# EAGLE board laser_sync (EAGLE 5.09)
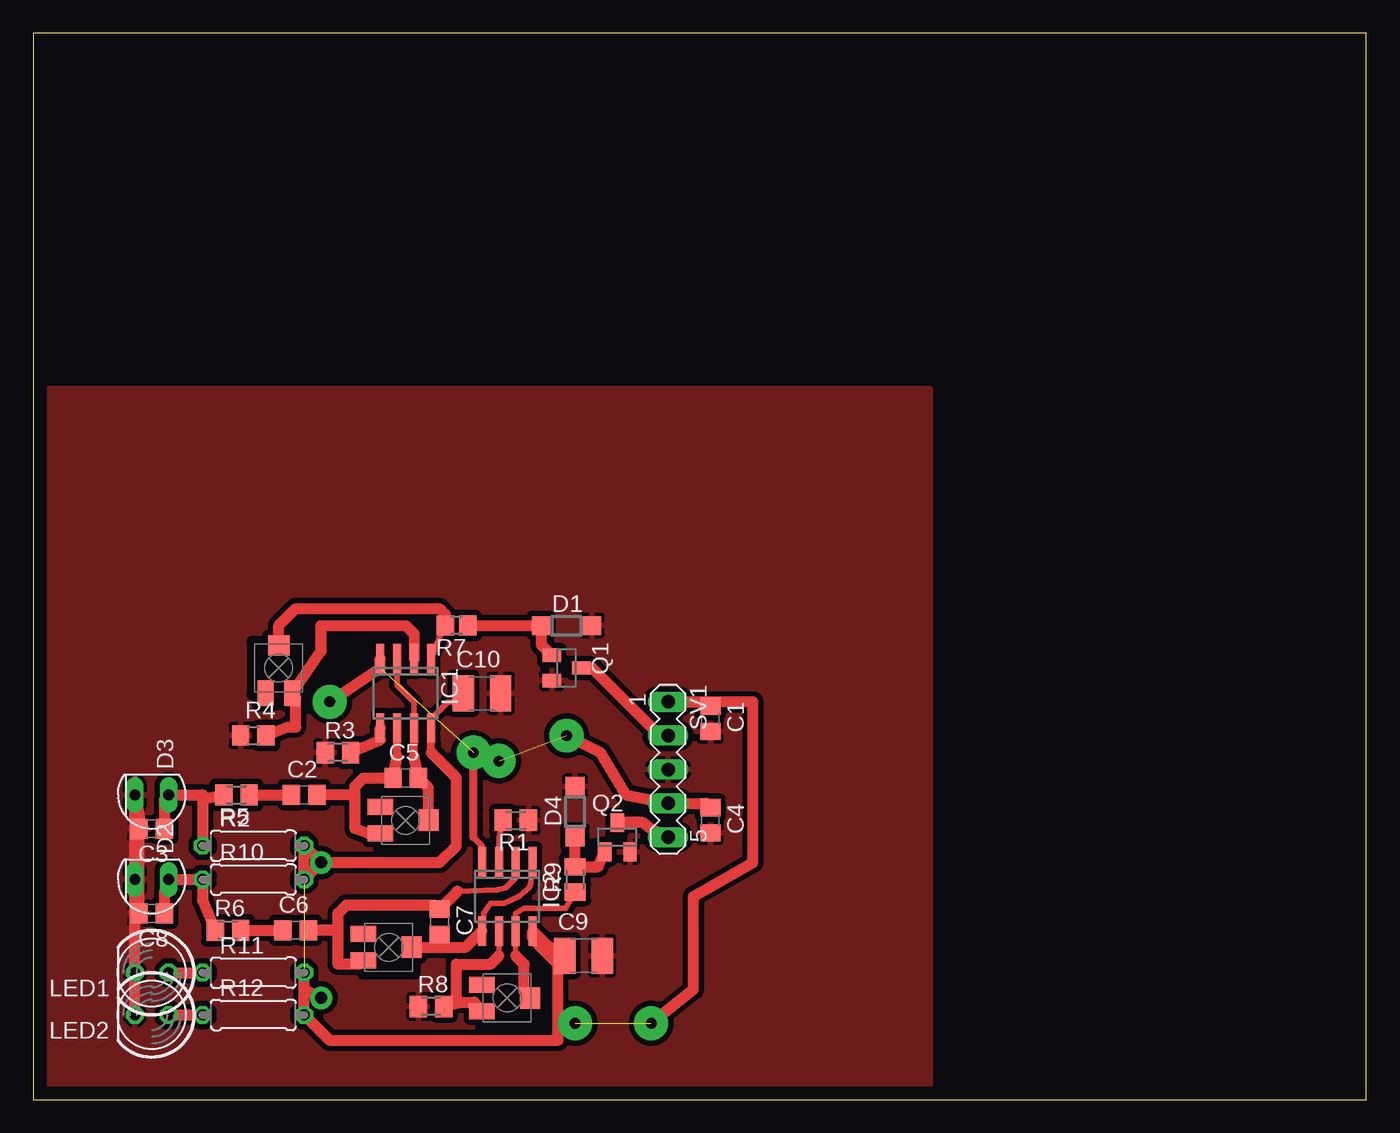
[diagram p0: board, top side]

Size 100 x 80 mm. Coordinates in mm from the lower left corner, seen from the top.
Outline: 0,0 100,0 100,80 0,80 0,0
Copper layers (1*16): Top 0.035mm / dielectric 1.5mm / Bottom 0.035mm
Design rules "default": minimum track width 10mil, minimum drill 24mil, track to track 8mil, track to pad 8mil, pad to pad 8mil, via to via 8mil, smd to smd 8mil, copper to edge 40mil, drill to drill 8mil, minimum pad ring 10mil, minimum via ring 8mil, stop-mask expansion 4mil, vias tented up to drill 0mil, thermal gap 10mil

## Footprints (pad centres in the part's own frame; a part is rotated, then mirrored left to right if it is on the bottom)
C0805 = smd 1.3 x 1.5: 1 -0.95,0; 2 0.95,0
C1210 = smd 1.6 x 2.7: 1 -1.4,0; 2 1.4,0
SOD123 = smd 1.4 x 1.4: A 1.9,0; C -1.9,0
SFH206 = drill 0.813 long: A 0,-1.27; K 0,1.27
SO08 = smd 0.6 x 2.2: 1 -1.905,-2.6; 2 -0.635,-2.6; 3 0.635,-2.6; 4 1.905,-2.6; 5 1.905,2.6; 6 0.635,2.6; 7 -0.635,2.6; 8 -1.905,2.6
LED5MM = drill 0.813 octagon: A -1.27,0; K 1.27,0
SOT23 = smd 1 x 1.4: 1 -0.95,-1.1; 2 0.95,-1.1; 3 0,1.1
M0805 = smd 1.3 x 1.6: 1 -0.95,0; 2 0.95,0
0207/7 = drill 0.813 octagon: 1 -3.81,0; 2 3.81,0
R0805 = smd 1.3 x 1.5: 1 -0.95,0; 2 0.95,0
R0805' = smd 1.3 x 1.5: 1 -0.85,0; 2 0.85,0
MA05-1 = drill 1.016 long: 1 -5.08,0; 2 -2.54,0; 3 0,0; 4 2.54,0; 5 5.08,0
TRIMMER_SMD = smd 1.2 x 1.9: A 1,-1.9; E -1,-1.9 | smd 1.6 x 1.5: S 0,1.7

## Placement (x,y rotation side)
C1  100n  [C0805]  50.8,28.57 270 top
C2  100n  [C0805]  20.32,22.86 0 top
C3  50n  [C0805]  8.89,20.32 180 top
C4  100n  [C0805]  50.8,20.95 270 top
C5  100n  [C0805]  27.94,24.13 0 top
C6  100n  [C0805]  19.68,12.7 0 top
C7  100n  [C0805]  30.48,13.34 270 top
C8  50n  [C0805]  8.89,13.97 180 top
C9  [C1210]  41.27,10.79 0 top
C10  [C1210]  33.66,30.48 0 top
D1  [SOD123]  40.01,35.56 0 top
D2  SFH206  [SFH206]  8.89,16.51 90 top
D3  SFH206  [SFH206]  8.89,22.86 90 top
D4  [SOD123]  40.64,21.59 90 top
IC1  TL072D  [SO08]  27.94,30.48 180 top
IC2  TL072D  [SO08]  35.56,15.24 180 top
LED1  [LED5MM]  8.89,9.53 180 top
LED2  [LED5MM]  8.89,6.35 180 top
Q1  BSS123  [SOT23]  40.01,32.38 270 top
Q2  BSS123  [SOT23]  43.81,19.68 0 top
R1  100  [M0805]  36.2,20.95 180 top
R2  200  [0207/7]  16.51,19.05 0 top
R3  100  [M0805]  22.86,26.04 0 top
R4  1k  [R0805]  16.51,27.3 0 top
R5  100  [M0805]  15.24,22.86 180 top
R6  100  [M0805]  14.61,12.7 0 top
R7  100  [R0805']  31.75,35.56 180 top
R8  1k  [M0805]  29.84,6.99 0 top
R9  100  [M0805]  40.64,16.51 90 top
R10  200  [0207/7]  16.51,16.51 0 top
R11  330  [0207/7]  16.51,9.53 0 top
R12  330  [0207/7]  16.51,6.35 0 top
SV1  [MA05-1]  47.62,24.77 270 top
TRIMM1  100K  [TRIMMER_SMD]  18.41,32.38 0 top
TRIMM2  100K  [TRIMMER_SMD]  27.94,20.95 270 top
U$1  TRIMMER  [TRIMMER_SMD]  35.56,7.62 270 top
U$2  TRIMMER  [TRIMMER_SMD]  26.67,11.43 270 top

## Library data of the parts
C1-C10 R2 R4 = rcl
D1 D4 = diode
D2 D3 = opto-trans-siemens
IC1 IC2 = linear
LED1 LED2 = led
Q1 Q2 = transistor-small-signal
R1 R3 R5-R12 = resistor
SV1 = con-lstb
TRIMM1 TRIMM2 U$1 U$2 = siro

## Nets
GND: C1.2 C3.2 C4.2 C8.2 C9.2 C10.2 D1.A D2.K D3.K D4.A LED1.K LED2.K Q1.2 Q2.2 R1.1 R3.1 R4.1 R8.1 SV1.3
N$1: IC1.2 R4.2 TRIMM1.A
N$2: C3.1 D3.A R2.1 R5.2
N$3: D1.C Q1.1 R7.1
N$4: IC1.1 R7.2 TRIMM1.S
N$5: C2.2 C5.1 IC1.6 TRIMM2.A
N$6: C7.2 IC2.1 IC2.5 U$2.S
N$7: IC1.5 R3.2
N$8: C8.1 D2.A R6.1 R10.1
N$9: IC2.6 R8.2 U$1.A
N$10: Q2.3 SV1.5
N$11: C2.1 R5.1
N$12: C6.1 R6.2
N$13: C6.2 C7.1 IC2.2 U$2.A
N$14: IC2.3 R1.2
N$15: C5.2 IC1.3 IC1.7 TRIMM2.S
N$16: C1.1 C9.1 C10.1 IC1.8 IC2.8 R2.2 R10.2 R11.2 R12.2 SV1.1
N$17: IC2.7 R9.1 U$1.S
N$18: D4.C Q2.1 R9.2
N$24: LED2.A R12.1
N$25: Q1.3 SV1.2
N$26: LED1.A R11.1
V-: C4.1 IC1.4 IC2.4 SV1.4

## Tracks (layer width: path | path; a pad name or v marks a point on that pad's centre or on a via)
GND
  Top 0.813: LED2.K LED1.K 7.62,17.46 C8.2 7.94,20 D2.K D3.K | D3.K 7.62,23.81 C3.2 7.94,21.27 D3.K
  pour Top (isolate 0.406): 0,53.34 0,0 67.31,0 67.31,53.34
N$1
  Top 0.813: R4.2 19.05,27.94 19.68,27.94 19.68,30.12 TRIMM1.A 21.59,33.66 21.59,35.56 27.94,35.56 28.57,34.92 IC1.2
N$2
  Top 0.813: C3.1 9.84,22.54 D3.A 12.7,22.86 12.7,22.55 | 12.7,22.55 R2.1 | 12.7,22.55 R5.2
N$3
  Top 0.813: R7.1 D1.C 38.1,34.13 Q1.1
N$4
  Top 0.406: IC1.1 30.84,35.62 R7.2
  Top 0.813: R7.2 30.9,36.41 30.48,36.83 19.68,36.83 18.41,35.56 TRIMM1.S
N$5
  Top 0.61: 27.3,25.71 IC1.6
  Top 0.813: TRIMM2.A 25.13,19.95 24.13,20.32 24.13,22.86 | 27.3,25.71 C5.1 24.77,24.13 24.13,23.5 24.13,22.86 | 24.13,22.86 C2.2
N$6
  Top 0.406: IC2.1 37.34,16.26 37.21,15.88 36.45,15.24 35.31,14.73 34.29,14.73 33.78,13.97 IC2.5
  Top 0.813: U$2.S 30.48,11.43 | 30.48,11.43 32.45,11.43 IC2.5 | 30.48,11.43 C7.2
N$7
  Top 0.813: IC1.5 26.04,26.99 R3.2
N$8
  Top 0.813: C8.1 9.84,15.55 D2.A R10.1 12.7,14.93 R6.1
N$9
  Top 0.406: 34.92,10.79 IC2.6
  Top 0.813: R8.2 32.07,7.3 | U$1.A 33.07,7.3 32.07,7.3 | 32.07,7.3 31.75,7.62 31.75,10.16 34.29,10.16 34.92,10.79
N$10
  Top 0.813: SV1.5 46.35,20.32 45.72,20.79 Q2.3
N$11
  Top 0.813: R5.1 C2.1
N$12
  Top 0.813: R6.2 C6.1
N$13
  Top 0.406: IC2.2 36.2,16.64 35.43,15.88 34.8,15.75 31.82,15.62
  Top 0.813: 22.86,12.7 22.86,10.16 24.5,10.16 U$2.A | 22.86,12.7 22.86,13.97 23.5,14.61 30.16,14.61 C7.1 31.82,15.62 | 22.86,12.7 C6.2
N$14
  Top 0.406: IC2.3 34.92,19.68 R1.2
N$15
  Top 0.406: IC1.3 27.3,31.11 28.57,29.84 IC1.7
  Top 0.61: 28.57,25.71 IC1.7
  Top 0.813: TRIMM2.S 29.64,23.38 C5.2 28.57,25.71
N$16  (via drill 0.8 pad 2.54, 0.9 pad 1.68)  (2 unrouted)
  Top 0.406: IC1.8 29.84,28.57 31.11,29.84 31.62,29.84 C10.1
  Top 0.61: 29.84,26.04 IC1.8
  Top 0.813: C9.1 38.55,11.56 IC2.8 37.47,12.06 39.37,10.16 39.37,5.71 | C1.1 49.84,29.84 SV1.1 53.98,29.84 53.98,17.78 49.53,15.24 49.53,8.26 v46.35,5.71 | 20.32,8.26 R12.2 22.23,4.45 39.37,4.45 39.37,5.71 | 20.32,8.26 R11.2 | v21.59,17.78 30.48,17.78 31.75,19.05 31.75,24.13 29.84,26.04 | v21.59,17.78 R2.2 R10.2 v21.59,17.78 | 20.32,8.26 v21.59,7.62 | 39.37,5.71 v40.64,5.71
N$17
  Top 0.406: 36.2,10.79 IC2.7 36.2,13.97 36.83,14.35 39.94,14.35 R9.1 | U$1.S 36.83,8.05
  Top 0.813: 36.2,10.79 36.83,10.16 36.83,8.05
N$18
  Top 0.813: Q2.1 42.38,17.46 R9.2 D4.C
N$19  (via drill 0.8 pad 2.54)
  other vias: 34.92,25.4
N$20  (via drill 0.8 pad 2.54)
  other vias: 33.02,26.04
N$21  (via drill 0.8 pad 2.54)
  other vias: 22.23,29.84
N$24
  Top 0.813: LED2.A R12.1
N$25
  Top 0.813: Q1.3 41.91,32.38 46.99,27.3 SV1.2
N$26
  Top 0.813: LED1.A R11.1
V-  (via drill 0.8 pad 2.54)  (2 unrouted)
  Top 0.406: IC2.4 33.66,19.05 33.02,19.68
  Top 0.61: 33.02,19.68 33.02,26.04
  Top 0.813: C4.1 50.48,22.23 SV1.4 44.45,22.86 42.55,26.04 v40.01,27.3 | 33.02,26.04 34.92,25.4 | IC1.4 26.04,32.38 22.23,29.84